# EAGLE board version1 (EAGLE 9.6.2)
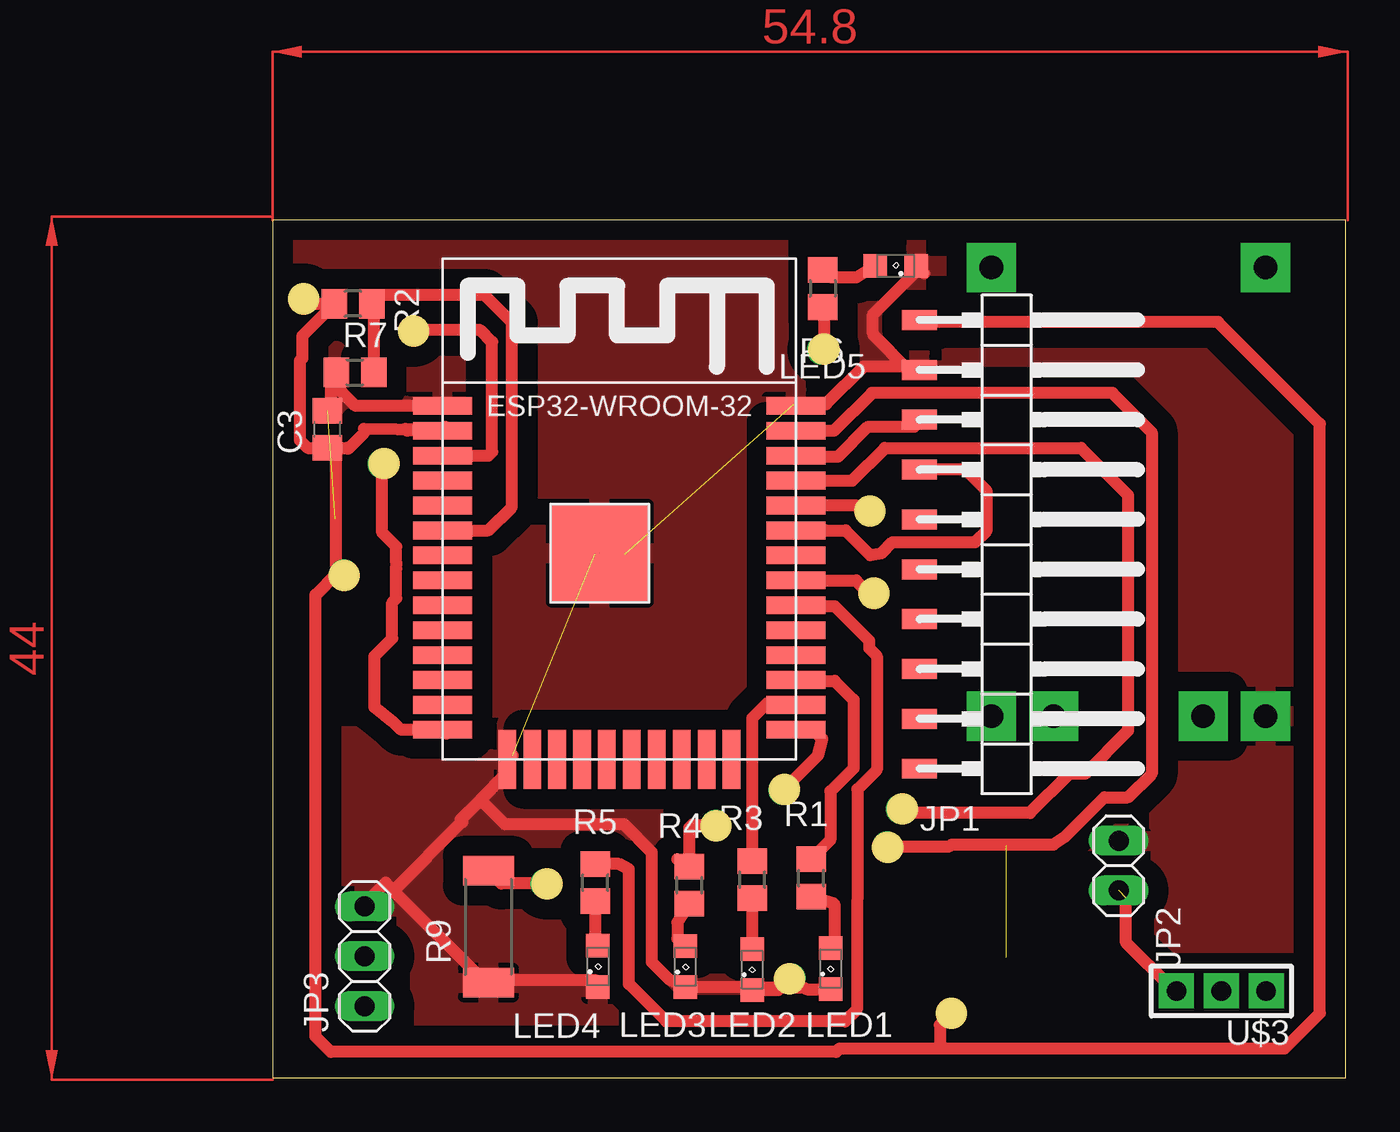
[diagram p0: board, top side]
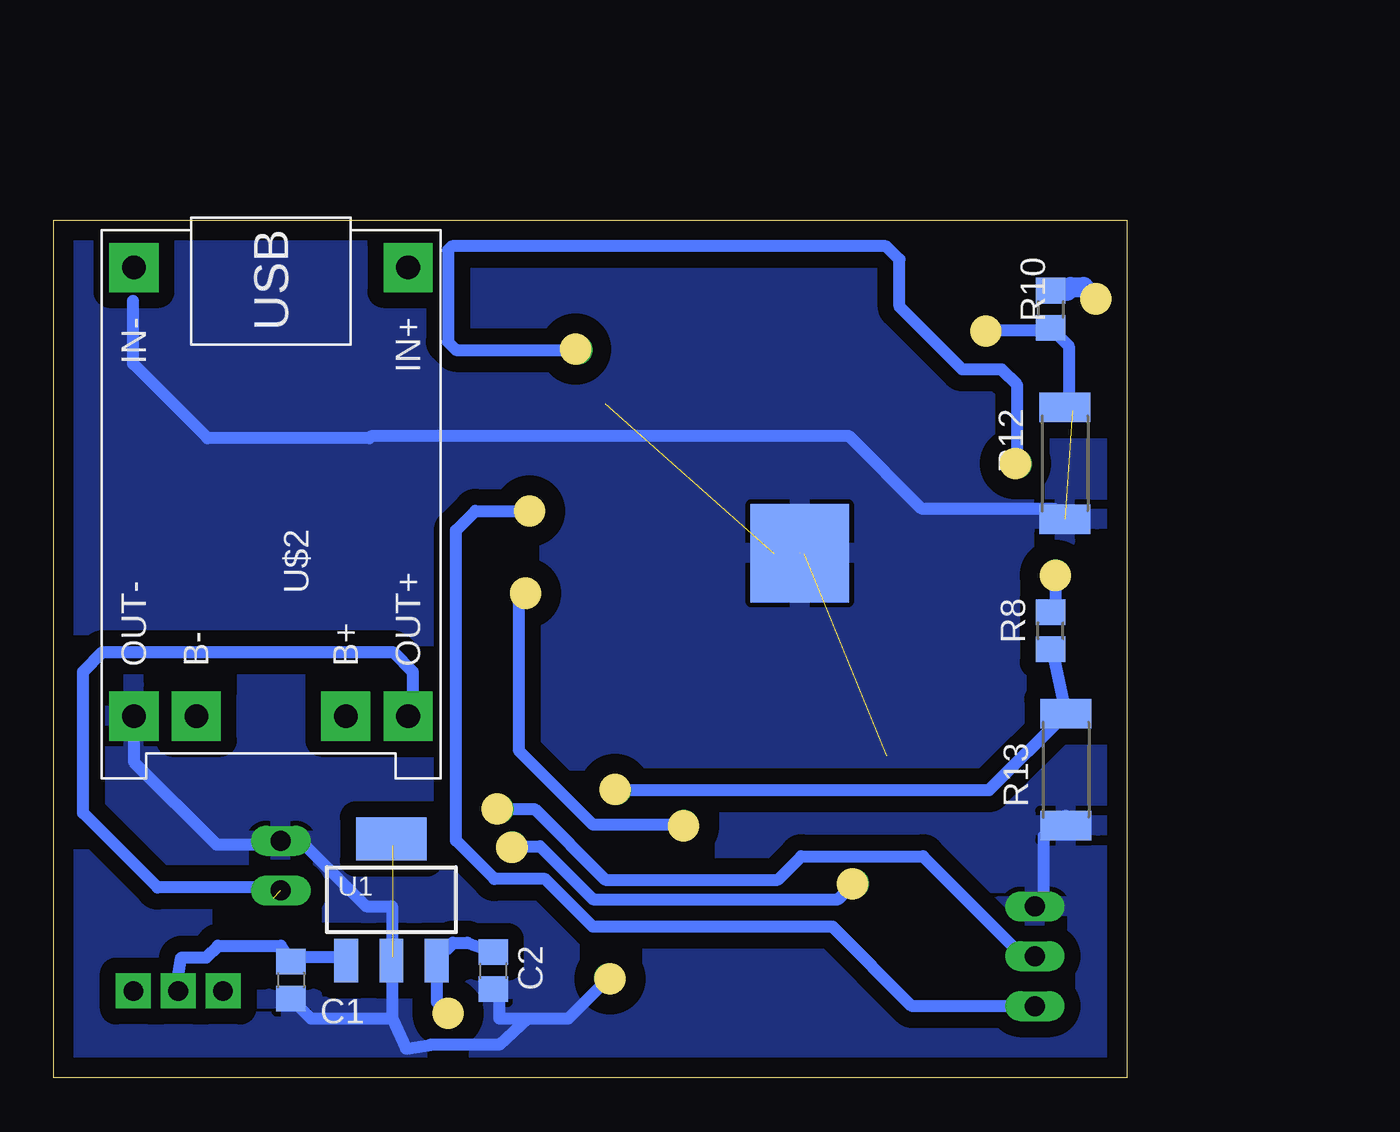
[diagram p1: board, bottom side, seen from below]

Size 54.7 x 43.7 mm. Coordinates in mm from the lower left corner, seen from the top.
Outline: 0,0 54.7,0 54.7,43.7 0,43.7 0,0
Outline: circle at 14,9.9 radius 0.28
Outline: circle at 3.65,25.6 radius 0.28
Outline: circle at 22.6,12.85 radius 0.28
Outline: circle at 26.1,14.7 radius 0.28
Outline: circle at 26.35,5.05 radius 0.28
Outline: circle at 34.6,3.3 radius 0.28
Outline: circle at 32.1,13.7 radius 0.28
Outline: circle at 31.35,11.75 radius 0.28
Outline: circle at 30.65,24.7 radius 0.28
Outline: circle at 30.45,28.9 radius 0.28
Outline: circle at 28.1,37.15 radius 0.28
Outline: circle at 7.2,38.05 radius 0.28
Outline: circle at 1.6,39.7 radius 0.28
Outline: circle at 5.7,31.3 radius 0.28
Copper layers (1*16): Top 0.035mm / dielectric 1.5mm / Bottom 0.035mm
Design rules "default": minimum track width 6mil, minimum drill 0.35mm, track to track 6mil, track to pad 6mil, pad to pad 6mil, via to via 6mil, smd to smd 6mil, copper to edge 40mil, drill to drill 6mil, minimum pad ring 10mil, minimum via ring 8mil, stop-mask expansion 4mil, vias tented up to drill 0mil, thermal gap 10mil
Net classes: 0 default: width 0.61 mm

## Footprints (pad centres in the part's own frame; a part is rotated, then mirrored left to right if it is on the bottom)
C0805 = smd 1.3 x 1.5: 1 -0.95,0; 2 0.95,0
1X10SMD/90 = smd 1.016 x 1.778: 1 -1.27,-5.08; 2 1.27,-5.08; 3 3.81,-5.08; 4 6.35,-5.08; 5 8.89,-5.08; 6 11.43,-5.08; 7 13.97,-5.08; 8 16.51,-5.08; 9 19.05,-5.08; 10 21.59,-5.08
1X02 = drill 1.016 long: 1 -1.27,0; 2 1.27,0
1X03 = drill 1.016 long: 1 -2.54,0; 2 0,0; 3 2.54,0
SML0805 = smd 1.2 x 1.2: A 1.05,0; C -1.05,0
R0805 = smd 1.3 x 1.5: 1 -0.95,0; 2 0.95,0
M2309 = smd 1.5 x 2.6: 1 -2.85,0; 2 2.85,0
SOT-223-3 = smd 1.219 x 2.235: 1 -2.311,-3.099; 2 0,-3.099; 3 2.311,-3.099 | smd 3.6 x 2.2: 4 0,3.099
ESP32-WROOM = smd 3 x 0.9: 3V3 0,16.74; EN 0,15.47; GND1 0,18.01; GND3 18,18.01; IO0 18,1.5; IO4 18,2.77; IO5 18,6.58; IO12 0,1.5; IO14 0,2.77; IO16 18,4.04; IO17 18,5.31; IO18 18,7.85; IO19 18,9.12; IO21 18,11.66; IO22 18,15.47; IO23 18,16.74; IO25 0,6.58; IO26 0,5.31; IO27 0,4.04; IO32 0,9.12; IO33 0,7.85; IO34 0,11.66; IO35 0,10.39; NC 18,10.39; RX 18,12.93; SENSOR_VN 0,12.93; SENSOR_VP 0,14.2; TX 18,14.2 | smd 0.9 x 3: CLK 9.635,0; CMD 8.365,0; GND2 3.285,0; IO2 14.715,0; IO13 4.555,0; IO15 13.445,0; SD0 10.905,0; SD1 12.175,0; SD2 5.825,0; SD3 7.095,0 | smd 5 x 5: GND4 8,10.5 | smd 5 x 5 bottom: GND5 8,10.5
BATTERY-CHARGER-LI-PROT = drill 1.2 pad 2.5 square: B+ 10.795,3.81; B- 10.795,-3.81; IN+ -12.065,6.985; IN- -12.065,-6.985; OUT+ 10.795,6.985; OUT- 10.795,-6.985
CON3 = drill 1 pad 1.778 square: P$1 -2.794,0.254; P$2 -0.508,0.254; P$3 1.778,0.254

## Placement (x,y rotation side)
C1  10uf  [C0805]  42.6,4.99 270 bottom
C2  10uf  [C0805]  32.3,5.47 270 bottom
C3  10uf  [C0805]  2.8,33.05 90 top
JP1  [1X10SMD/90]  38.05,37.35 270 top
JP2  [1X02]  43.12,10.82 90 top
JP3  [1X03]  4.7,6.2 90 top
LED1  [SML0805]  28.44,5.57 90 top
LED2  [SML0805]  24.44,5.52 90 top
LED3  [SML0805]  21.04,5.67 90 top
LED4  [SML0805]  16.59,5.69 90 top
LED5  [SML0805]  31.76,41.39 180 top
R1  330  [R0805]  27.45,10.19 90 top
R2  10k  [R0805]  4.11,39.45 180 top
R3  330  [R0805]  24.45,10.11 90 top
R4  330  [R0805]  21.25,9.83 90 top
R5  330  [R0805]  16.45,9.95 90 top
R6  330  [R0805]  28.05,40.23 270 top
R7  10k  [R0805]  4.21,35.95 0 top
R8  10k  [R0805]  3.9,22.79 90 bottom
R9  [M2309]  11.01,7.71 90 top
R10  10k  [R0805]  3.89,39.17 90 bottom
R12  [M2309]  3.17,31.32 90 bottom
R13  [M2309]  3.12,15.71 90 bottom
U1  TC1262_VDB  [SOT-223-3]  37.49,9.08 0 bottom
U$1  ESP32-WROOM  [ESP32-WROOM]  8.68,16.24 0 top
U$2  BATTERY-CHARGER-LI-PROT  [BATTERY-CHARGER-LI-PROT]  43.62,29.23 270 bottom
U$3  -MICROSW  [CON3]  47.84,4.69 180 top

## Library data of the parts
C1-C3 = rcl; SPICEPREFIX: C
JP1 = pinhead-2
JP2 JP3 = pinhead
LED1-LED5 = led
R1-R10 R12 R13 = rcl; SPICEPREFIX: R
U1 = bt_regulator
U$1 = ESP32
U$2 = diy-modules
U$3 = tango

## Nets
ADC34: R2.1 R7.2 U$1.IO34
BAT0: R1.2 U$1.IO16
BAT1: R3.2 U$1.IO4
BAT2: R4.2 U$1.IO19
BAT3: R5.2 U$1.IO18
BUTTON: R9.2 U$1.IO23
EN: R10.1 R12.2 U$1.EN
GND: C1.2 C2.2 C3.2 JP1.2 JP2.2 JP3.3 LED1.C LED2.C LED3.C LED4.C LED5.C R7.1 R9.1 R12.1 R13.1 U$1.GND1 U$1.GND2 U$1.GND3 U$1.GND4 U$1.GND5 U$2.OUT-
INDICATOR: R6.2 U$1.IO12
IO0: R8.1 R13.2 U$1.IO0
N$1: LED5.A R6.1
N$2: JP2.1 U$2.OUT+ U$3.P$3
N$3: LED1.A R1.1
N$4: LED2.A R3.1
N$5: LED3.A R4.1
N$6: LED4.A R5.1
N$7: C1.1 U1.1 U$3.P$2
RX: JP3.1 U$1.RX
SCL: JP1.3 U$1.IO22
SDA: JP1.4 U$1.IO21
TAB: U1.2 U1.4
TX: JP3.2 U$1.TX
VCC: C2.1 C3.1 JP1.1 R2.2 R8.2 R10.2 U1.3 U$1.3V3

## Tracks (layer width: path | path; a pad name or v marks a point on that pad's centre or on a via)
ADC34
  Top 0.61: 5.2,36 R7.2 | 8.61,27.83 U$1.IO34 11,27.9 12.2,29.1 12.2,38.5 10.8,39.9 5.51,39.9 R2.1 5.16,39.35 R7.2 | 5.51,36.3 R7.2
BAT0
  Top 0.61: R1.2 28.43,12.12 28.43,14.6 29.61,15.78 29.61,19.27 28.65,20.23 26.73,20.23 U$1.IO16
BAT1
  Top 0.61: U$1.IO4 26.58,19.11 25.22,19.11 24.44,18.33 24.44,11.09 R3.2
BAT2  (via drill 1)
  Top 0.61: 26.66,25.38 U$1.IO19 29.74,25.36 30.4,24.7 v30.6,24.7 | 20.63,11.15 R4.2 21.25,12.75 21.4,12.9 v22.6,12.9
  Bottom 0.61: v22.6,12.9 27.2,12.9 31,16.7 31,24.3 v30.6,24.7
BAT3
  Top 0.61: R5.2 17.65,10.9 18.16,10.63 18.16,4.79 20.07,2.89 29.19,2.89 29.78,3.48 29.81,14.71 30.8,15.7 30.8,21.5 30.4,21.9 30.4,22.29 28.65,24.04 26.73,24.04 U$1.IO18
BUTTON  (via drill 1)
  Top 0.61: v13.92,9.91 11.66,9.91 R9.2 | U$1.IO23 28.61,32.98 30.54,34.91 32.62,34.91 32.63,34.9 42.8,34.9 44.8,32.9 44.8,15.5 43.6,14.3 42.4,14.3 40.4,12.3 39.8,11.9 34.61,11.9 34.52,11.81 v31.32,11.81
  Bottom 0.61: v13.92,9.91 14.72,9.11 27.21,9.11 29.92,11.81 v31.32,11.81
EN  (via drill 1 pad 1)
  Top 0.61: 8.61,31.64 U$1.EN 11.01,31.71 11.2,31.9 11.2,37.5 10.6,38.1 v7.2,38.1
  Bottom 0.61: 4.19,34.17 R12.2 2.97,34.37 2.97,37.3 R10.1 4.01,38.1 v7.2,38.1
GND  (via drill 1)  (4 unrouted)
  Top 0.61: 33.21,40.99 32.95,41.25 | 32.95,41.25 LED5.C | 2.77,34 C3.2 | R7.1 3,35.68 3,35.5 | 8.44,34.33 U$1.GND1 4.25,34.25 3,35.5 | LED4.C 16.44,4.99 11.11,4.99 R9.1 10.72,4.99 6.17,9.54 | LED2.C 24.06,4.61 21.23,4.61 LED3.C 20.18,5.06 19.33,5.92 19.33,11.51 17.9,12.94 11.83,12.94 10.6,14.17 | LED1.C 27.2,4.52 27.01,4.61 24.44,4.61 LED2.C | 6.17,9.54 9.67,13.04 9.57,13.14 10.6,14.17 | 10.6,14.17 11.96,15.54 U$1.GND2 12.25,16.42 | JP3.3 4.63,8.8 5.77,9.94 6.17,9.54 | 3.13,34 C3.2 | 16.44,26.71 U$1.GND4 16.82,27.09 | 26.58,34.35 U$1.GND3 26.73,34.33 28.21,34.33 30.14,36.25 32.8,36.25 JP1.2 32.42,36.08 30.6,37.9 30.6,38.9 32.95,41.25 | v26.4,5.1 25.77,4.47 LED2.C | C3.2 3,34.2 3,35.5
  Bottom 0.61: 30.52,3.03 31.99,1.7 35.46,1.7 36.74,1.5 37.45,3.03 | 30.52,3.03 32,3.03 32,4.55 32.06,4.61 C2.2 | 30.52,3.03 28.47,3.03 v26.4,5.1 | C1.2 41.59,3.03 37.45,3.03 | JP2.2 43.05,12.09 42.99,12.15 | 16.44,27.09 U$1.GND4 16.82,26.71 17.96,26.71 | JP3.3 4.63,8.8 4.25,9.18 4.25,12.33 R13.1 3.12,13.35 | 3.11,28.24 R12.1 3.71,28.99 3.71,29 10.45,29 14.15,32.7 38.5,32.7 38.6,32.6 46.85,32.6 50.65,36.4 50.65,39.59 | U$2.OUT- 50.61,16.11 46.4,11.9 43.31,11.9 JP2.2 | JP2.2 42.12,12.09 38.79,8.76 37.45,8.76 37.45,3.03
  pour Top (isolate 1.016): 0,0.1 0,43.7 54.8,43.7 54.8,0.3 54.6,0.1
  pour Bottom (isolate 0.813): 0,-0.1 0,43.9 54.4,43.9 54.6,43.7 54.8,43.5 54.8,0.1 0.2,0.1
INDICATOR  (via drill 1)
  Top 0.61: R6.2 28.12,39.21 28.12,37.22 v28,37.1 | 8.88,17.55 U$1.IO12 6.56,17.74 6.15,18.15 5.2,18.9 5.2,21.5 6.11,22.41 6.11,24.23 6.31,24.43 6.31,25.94 6.32,26.25 6.31,26.26 6.31,27.07 5.6,27.79 v5.6,31.3
  Bottom 0.61: v5.6,31.3 5.6,35.3 6.4,36.1 8.4,36.1 11.6,39.3 11.6,41.7 12.28,42.38 34.4,42.38 34.6,42.18 34.6,37.5 34.2,37.1 v28,37.1
IO0  (via drill 1)
  Top 0.61: U$1.IO0 27.78,17.74 27.78,17.52 28.01,17.29 27.78,16.41 v26.03,14.67 25.98,14.62
  Bottom 0.61: R8.1 3.81,21.75 R13.2 3.14,18.56 7.03,14.67 v26.03,14.67
N$1
  Top 0.61: LED5.A 29.75,40.81 28.48,40.81 R6.1
N$2  (1 unrouted)
  Top 0.61: 43.49,9.18 43.49,6.9 45.78,4.61 U$3.P$3
  Bottom 0.61: JP2.1 43.27,9.7 49.4,9.7 53.2,13.5 53.2,20.7 52.2,21.7 37.4,21.7 36.4,20.7 36.4,18.67 U$2.OUT+
N$3
  Top 0.61: LED1.A 28.63,6.9 28.63,8.86 R1.1
N$4
  Top 0.61: LED2.A 24.44,6.9 24.44,8.8 R3.1
N$5
  Top 0.61: LED3.A 20.63,7.1 20.63,7.93 R4.1
N$6
  Top 0.61: LED4.A 16.44,6.9 16.44,8.8 R5.1
N$7
  Bottom 0.61: U1.1 40.06,6.13 42.35,6.13 C1.1 43.13,6.73 46.32,6.73 46.92,6.13 48.17,6.13 48.2,6.1 48.44,4.61 U$3.P$2
RX  (via drill 1)
  Top 0.61: 26.66,29.19 U$1.RX 29.73,29.17 30,28.9 v30.4,28.9
  Bottom 0.61: 5.01,3.85 JP3.1 10.96,3.66 15,7.7 27.22,7.7 29.65,10.14 32.23,10.14 34.2,12.1 34.2,27.9 33.2,28.9 v30.4,28.9
SCL
  Top 0.61: U$1.IO22 26.75,31.64 28.81,31.64 30.36,33.19 32.7,33.19 JP1.3
SDA
  Top 0.61: 32.7,30.9 JP1.4 35.3,31 36.4,29.9 36.4,27.9 35.8,27.3 31.6,27.3 31.06,26.76 30.46,26.64 29.2,27.9 U$1.IO21 28.2,27.9
TAB  (1 unrouted)
  Bottom 0.61: 37.4,6.13 U1.2 | 37.4,11.85 U1.4
TX  (via drill 1)
  Top 0.61: 26.57,30.34 U$1.TX 29.54,30.44 31.2,32.1 41.2,32.1 43.6,29.7 43.6,17.7 41.4,15.5 40.6,15.5 38.6,13.5 32.2,13.5 v32,13.7
  Bottom 0.61: 5.01,6.52 JP3.2 5.3,6.2 10.4,11.3 16.6,11.3 17.8,10.1 26.6,10.1 30.2,13.7 v32,13.7
VCC  (via drill 1, 1 pad 1)
  Top 0.61: 3.49,39.28 R2.2 | 8.82,33.19 U$1.3V3 6.88,32.98 6.78,33.08 7.98,33.02 4.67,33.07 4.67,32.87 3.85,32.05 3.8,32.1 C3.1 | JP1.1 32.7,38.52 48.18,38.52 53.38,33.32 53.38,3.3 51.58,1.5 34,1.5 | C3.1 2.75,32.15 | 34,1.5 28.9,1.5 28.73,1.32 2.98,1.32 2.2,2.1 2.2,24.62 3.25,25.67 v3.65,25.67 3.25,26.07 3.25,31.65 C3.1 | v34.6,3.3 34,2.7 34,1.5 | C3.1 1.8,32.1 1.4,32.5 1.4,36.55 1.52,36.67 1.52,37.81 R2.2 | v1.62,39.7 1.87,39.45 R2.2
  Bottom 0.61: 4.25,40.04 R10.2 | R8.2 3.65,23.99 v3.65,25.67 | 32.26,6.68 C2.1 33.61,6.9 34.35,6.9 35.11,6.13 U1.3 35.18,3.88 v34.6,3.3
  Bottom 1.016: R10.2 3.05,40.12 2.87,40.3 2.22,40.3 v1.62,39.7 1.52,39.7
(copper drawn outside any net)
  shapes: Top area x2